# Altium PCB PCB1.PcbDoc (part 6 of 8)
Units mil, origin at the board's own origin, x right, y up, seen from the top; angles counter-clockwise.
Board outline 3820 x 2600 mil, 2 copper layers (Top Layer, Bottom Layer); 88 components, 130 nets, 566 pads, 113 vias.
Unrouted connection lines stored in the file: 16.
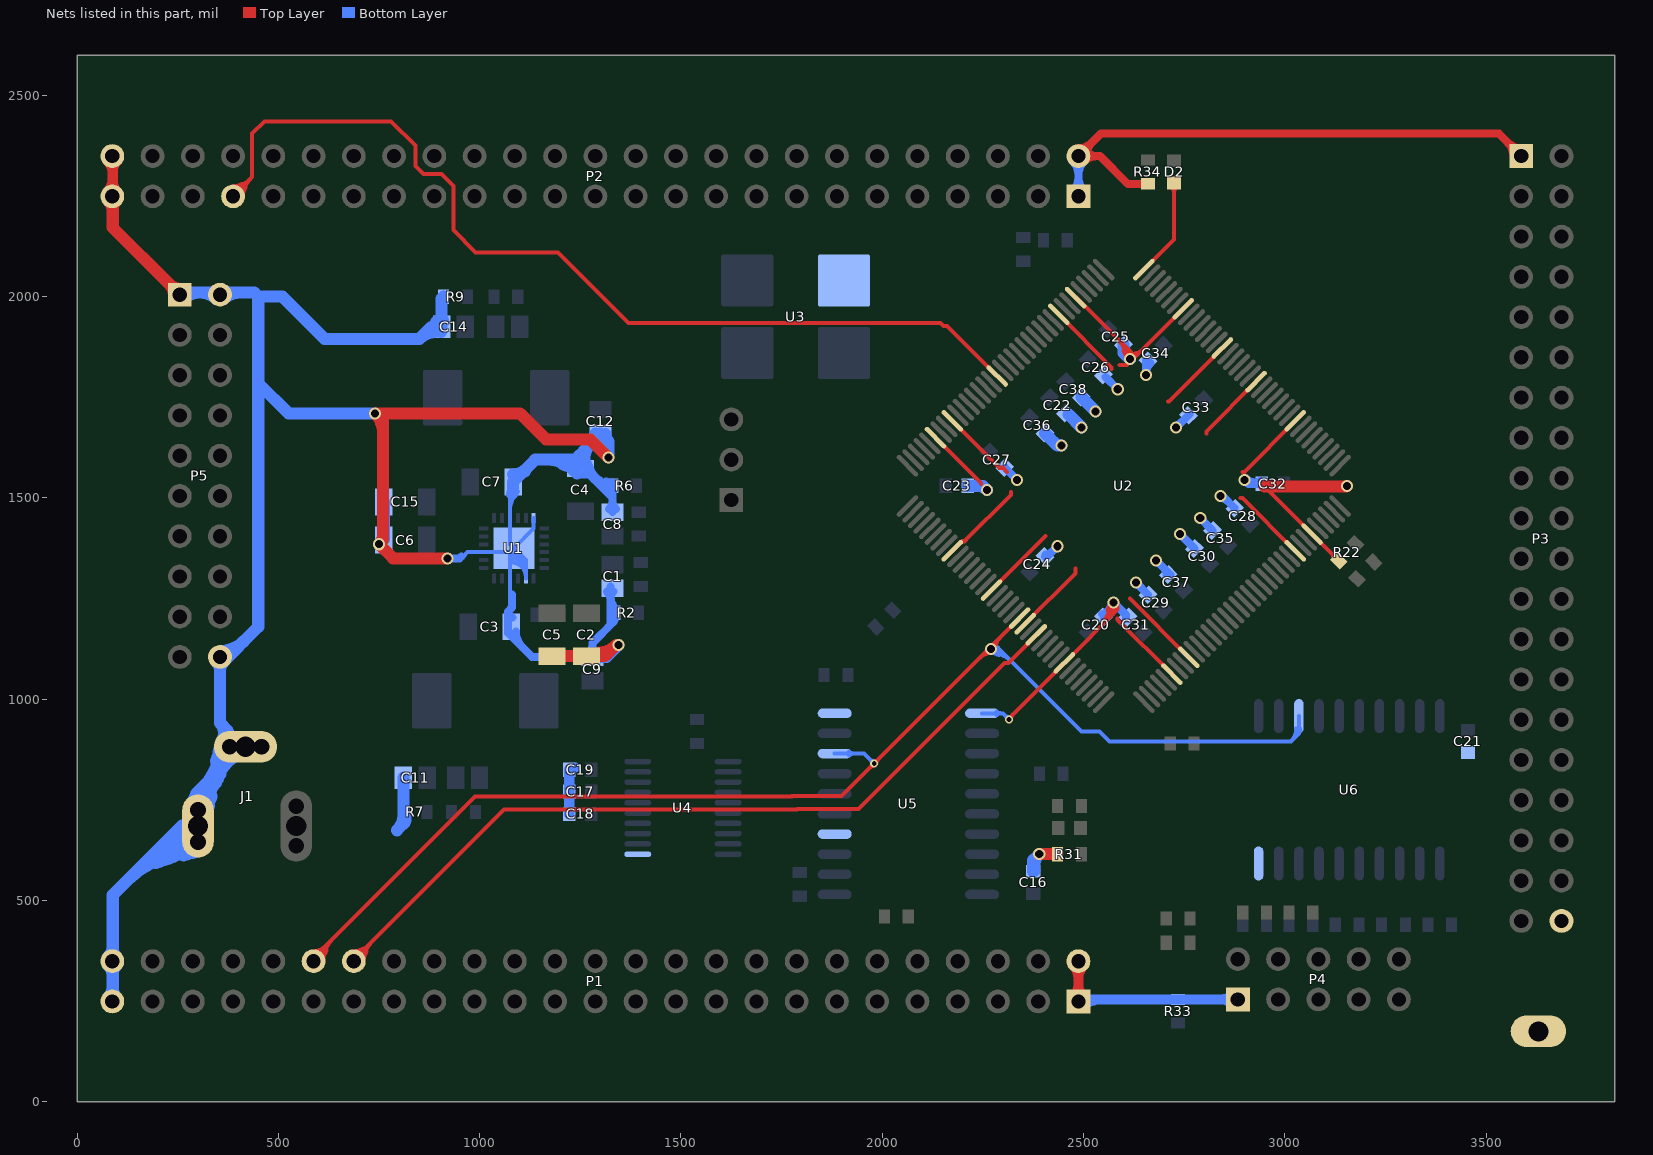
[diagram p6: the nets of this part, all layers, seen from the top]

## Via types
v1: diameter 30, hole 20, Top Layer to Bottom Layer, 74 vias
v2: diameter 20, hole 12, Top Layer to Bottom Layer, 36 vias
v3: diameter 17.72, hole 11.81, Top Layer to Bottom Layer, 3 vias

## Nets (pads, with @x,y where several pads share a name; then routed paths per layer and width w, separated by ;. In a path a pad name is that pad's centre, name@x,y a point inside that pad or via, vN(x,y) a via of type N, cw(c..) or ccw(c..) an arc to the next point about the centre after c; other vN are vias at no path point) (continued)
GND: C1.1 C2.2 C3.2 C4.2 C5.2 C6.2 C7.2 C8.1 C9.1 C11.1 C12.1 C14.1 C15.2 C16.2 C17.1 C18.2 C19.1 C20.1 C21.2 C22.1 C23.1 C24.1 C25.1 C26.1 C27.1 C28.1 C29.1 C30.1 C31.1 C32.1 C33.1 C34.1 C35.1 C36.1 C37.1 C38.1 J1.2 J1.2A J1.2B J1.3 J1.3A J1.3B P1.1 P1.2 P1.49 P1.50 P2.1 P2.2 P2.49 P2.50 P3.1 P3.40 P4.1 P5.1 P5.2 P5.20 pad.0 R2.1 R6.1 R7.1 R9.1 R22.1 R31.1 R33.1 R34.2 U1.2 U1.4 U1.9 U1.15 U1.18 U1.25 U2.9 U2.16 U2.22 U2.29 U2.42 U2.45 U2.64 U2.67 U2.81 U2.88 U2.94 U2.101 U2.114 U2.117 U2.136 U2.139 U3.2 U4.11 U5.4 U5.10 U5.11 U6.10 | length 38025
  Top Layer w10: U2.67@2132.31,1649.71 2245,1537.02 2245,1535 ; U2.81@2174.07,1368.53 2197.93,1392.4 2204.56,1392.4 2320,1507.84 2320,1515 ; U2.64@2174.07,1691.47 2290.53,1575 2300,1575 2310,1565 ; U2.88@2271.5,1271.1 2271.5,1271.5 2405,1405 ; v2@2313.65,951.35 U2.101@2452.45,1090.15 2585,1222.69 v1@2585,1230 ; U2.94@2355.02,1187.58 2480,1312.56 2480,1325 ; U2.45@2438.53,1955.93 2570,1824.47 2570,1820 ; U2.42@2480.29,1997.69 2482.31,1997.69 2615,1865 ; 2559.45,1210.39 ccw(c2540.97,1228.54) v1@2565.52,1236.81 ; v1@2565.39,1237.22 cw(c2556.13,1234.55) 2563.01,1227.79 cw(c2569.89,1221.04) v1@2572.4,1230.34 ; 2570.87,1222.01 ccw(c2558.28,1234.37) v1(2575,1240) ; 2585,1200 2585,1197.02 U2.114@2719.71,1062.31 ; 2590,1830 2607.69,1830 ; v1@2605.37,1847.71 ccw(c2596.16,1850.3) 2602.93,1857.07 ccw(c2609.7,1863.84) v1@2612.29,1854.63 ; 2615,1250 2760.93,1104.07 U2.117@2761.47,1104.07 ; v1@2618.85,1841.15 U2.29@2747.55,1969.85 ; 2710,1740 2712.56,1740 U2.22@2844.98,1872.42 ; 2805,1660 2805,1665.4 U2.16@2928.5,1788.9 ; 2890,1500 2894.47,1500 U2.136@3025.93,1368.53 ; 2895,1565 2899.47,1565 U2.9@3025.93,1691.47 ; 2950,1530 2950,1527.98 U2.139@3067.69,1410.29 3133.86,1344.12 R22.1@3144.12,1344.12 ; U2.81@2194.95,1390.32 ccw(c2194.95,1408.5) 2207.8,1395.64 ; U2.81@2194.95,1390.32 ccw(c2194.95,1408.5) 2207.8,1395.64 ; U2.81@2194.95,1390.32 ccw(c2194.95,1408.5) 2207.8,1395.64 ; U2.81@2195.59,1388.77 cw(c2204.34,1380.01) 2204.34,1392.4 ; U2.81@2195.59,1388.77 cw(c2204.34,1380.01) 2204.34,1392.4 ; U2.81@2195.59,1388.77 cw(c2204.34,1380.01) 2204.34,1392.4 ; 2538.62,1176.31 ccw(c2474.93,1240) v1@2565,1240 ; 2538.62,1176.31 ccw(c2474.93,1240) v1@2565,1240 ; 2538.62,1176.31 ccw(c2474.93,1240) v1@2565,1240 ; 2553.74,1196.41 cw(c2609.12,1182.11) v1@2580.08,1231.39 ; 2553.74,1196.41 cw(c2609.12,1182.11) v1@2580.08,1231.39 ; 2553.74,1196.41 cw(c2609.12,1182.11) v1@2580.08,1231.39 ; 2555.69,1193.38 ccw(c2509.07,1240) v1(2575,1240) ; 2555.69,1193.38 ccw(c2509.07,1240) v1(2575,1240) ; 2555.69,1193.38 ccw(c2509.07,1240) v1(2575,1240) ; 2559.78,1219.79 cw(c2591.79,1211.52) v1(2575,1240) ; 2559.78,1219.79 cw(c2591.79,1211.52) v1(2575,1240) ; 2559.78,1219.79 cw(c2591.79,1211.52) v1(2575,1240) ; v1@2566.34,1235 cw(c2545.43,1222.93) 2568.75,1216.68 ; v1@2566.34,1235 cw(c2545.43,1222.93) 2568.75,1216.68 ; v1@2566.34,1235 cw(c2545.43,1222.93) 2568.75,1216.68 ; 2568.75,1216.68 cw(c2592.07,1210.43) v1@2580,1231.34 ; 2568.75,1216.68 cw(c2592.07,1210.43) v1@2580,1231.34 ; 2568.75,1216.68 cw(c2592.07,1210.43) v1@2580,1231.34 ; 2572.76,1210.45 ccw(c2543.21,1240) v1@2585,1240 ; 2572.76,1210.45 ccw(c2543.21,1240) v1@2585,1240 ; 2572.76,1210.45 ccw(c2543.21,1240) v1@2585,1240 ; 2583.79,1896.21 cw(c2532.57,1845) v1@2605,1845 ; 2583.79,1896.21 cw(c2532.57,1845) v1@2605,1845 ; 2583.79,1896.21 cw(c2532.57,1845) v1@2605,1845 ; 2599.63,1865.02 ccw(c2631.49,1873.56) v1(2615,1845) ; 2599.63,1865.02 ccw(c2631.49,1873.56) v1(2615,1845) ; 2599.63,1865.02 ccw(c2631.49,1873.56) v1(2615,1845) ; 2600.86,1879.14 cw(c2566.72,1845) v1(2615,1845) ; 2600.86,1879.14 cw(c2566.72,1845) v1(2615,1845) ; 2600.86,1879.14 cw(c2566.72,1845) v1(2615,1845) ; v1@2606.34,1850 ccw(c2585.43,1862.07) 2608.75,1868.32 ; v1@2606.34,1850 ccw(c2585.43,1862.07) 2608.75,1868.32 ; v1@2606.34,1850 ccw(c2585.43,1862.07) 2608.75,1868.32 ; 2608.75,1868.32 ccw(c2632.07,1874.57) v1@2620,1853.66 ; 2608.75,1868.32 ccw(c2632.07,1874.57) v1@2620,1853.66 ; 2608.75,1868.32 ccw(c2632.07,1874.57) v1@2620,1853.66 ; v1(2615,1845) cw(c2638.96,1834.22) 2632.16,1859.6 ; v1(2615,1845) cw(c2638.96,1834.22) 2632.16,1859.6 ; v1(2615,1845) cw(c2638.96,1834.22) 2632.16,1859.6 ; v1@2615,1855 ccw(c2615,1897.71) 2645.2,1867.51 ; v1@2615,1855 ccw(c2615,1897.71) 2645.2,1867.51 ; v1@2615,1855 ccw(c2615,1897.71) 2645.2,1867.51 ; 2617.93,1862.07 cw(c2600.86,1845) v1@2625,1845 ; 2617.93,1862.07 cw(c2600.86,1845) v1@2625,1845 ; 2617.93,1862.07 cw(c2600.86,1845) v1@2625,1845 ; 3115.91,1362.07 ccw(c3131.34,1377.5) R22.1@3131.34,1355.68 ; 3115.91,1362.07 ccw(c3131.34,1377.5) R22.1@3131.34,1355.68 ; 3115.91,1362.07 ccw(c3131.34,1377.5) R22.1@3131.34,1355.68 ; 3116.53,1361.45 cw(c3101.98,1346.9) R22.1@3122.56,1346.9 ; 3116.53,1361.45 cw(c3101.98,1346.9) R22.1@3122.56,1346.9 ; 3116.53,1361.45 cw(c3101.98,1346.9) R22.1@3122.56,1346.9 ; 3120.14,1355.93 ccw(c3133.8,1359.59) R22.1@3131.1,1345.71 ; 3120.14,1355.93 ccw(c3133.8,1359.59) R22.1@3131.1,1345.71 ; 3120.14,1355.93 ccw(c3133.8,1359.59) R22.1@3131.1,1345.71 ; 3122.05,1358.17 cw(c3118.28,1344.09) R22.1@3132.53,1347.16 ; 3122.05,1358.17 cw(c3118.28,1344.09) R22.1@3132.53,1347.16 ; 3122.05,1358.17 cw(c3118.28,1344.09) R22.1@3132.53,1347.16 ; v2@2320,950 cw(c2338.57,950) 2325.44,963.13 ccw(c2338.57,950) v2@2320,950
  Top Layer w20: R34.2@2660,2280.47 2659.53,2280 2610,2280 2540.79,2349.21 P2.2@2487.4,2349.21 2543.19,2405 3531.61,2405 P3.1@3587.4,2349.21 ; P2.2@2486.94,2349.31 cw(c2520,2342.54) 2511.26,2375.13 ; P2.2@2486.94,2349.31 cw(c2520,2342.54) 2511.26,2375.13 ; P2.2@2486.94,2349.31 cw(c2520,2342.54) 2511.26,2375.13 ; P2.2@2487.4,2368.74 ccw(c2487.4,2415.88) 2520.74,2382.55 ; P2.2@2487.4,2368.74 ccw(c2487.4,2415.88) 2520.74,2382.55 ; P2.2@2487.4,2368.74 ccw(c2487.4,2415.88) 2520.74,2382.55 ; P2.2@2487.5,2348.75 ccw(c2480.73,2381.81) 2513.32,2373.08 ; P2.2@2487.5,2348.75 ccw(c2480.73,2381.81) 2513.32,2373.08 ; P2.2@2487.5,2348.75 ccw(c2480.73,2381.81) 2513.32,2373.08 ; P2.2@2501.21,2335.4 cw(c2534.54,2302.07) 2534.54,2349.21 ; P2.2@2501.21,2335.4 cw(c2534.54,2302.07) 2534.54,2349.21 ; P2.2@2501.21,2335.4 cw(c2534.54,2302.07) 2534.54,2349.21 ; P2.2@2501.21,2363.02 ccw(c2534.54,2396.36) 2534.54,2349.21 ; P2.2@2501.21,2363.02 ccw(c2534.54,2396.36) 2534.54,2349.21 ; P2.2@2501.21,2363.02 ccw(c2534.54,2396.36) 2534.54,2349.21 ; P2.2@2506.93,2349.21 cw(c2554.07,2349.21) 2520.74,2382.55 ; P2.2@2506.93,2349.21 cw(c2554.07,2349.21) 2520.74,2382.55 ; P2.2@2506.93,2349.21 cw(c2554.07,2349.21) 2520.74,2382.55 ; 3554.07,2382.55 cw(c3520.73,2349.21) P3.1@3567.87,2349.21 ; 3554.07,2382.55 ccw(c3587.4,2415.88) P3.1@3587.4,2368.74 ; 3554.07,2382.55 cw(c3520.73,2349.21) P3.1@3567.87,2349.21 ; 3554.07,2382.55 ccw(c3587.4,2415.88) P3.1@3587.4,2368.74 ; 3554.07,2382.55 ccw(c3587.4,2415.88) P3.1@3587.4,2368.74 ; 3554.07,2382.55 cw(c3520.73,2349.21) P3.1@3567.87,2349.21
  Top Layer w25: P2.49@88.46,2249.21 P2.50@88.46,2349.21 ; P1.1@2487.4,249.21 P1.2@2487.4,349.21 ; P2.49@75.36,2261.25 ccw(c43.73,2292.89) 88.46,2292.89 ; P2.49@75.36,2261.25 ccw(c43.73,2292.89) 88.46,2292.89 ; P2.49@75.36,2261.25 ccw(c43.73,2292.89) 88.46,2292.89 ; P2.50@75.36,2337.17 cw(c43.73,2305.54) 88.46,2305.54 ; P2.50@75.36,2337.17 cw(c43.73,2305.54) 88.46,2305.54 ; P2.50@75.36,2337.17 cw(c43.73,2305.54) 88.46,2305.54 ; 88.46,2287.75 ccw(c125.94,2287.75) P2.49@99.44,2261.25 ; 88.46,2287.75 ccw(c125.94,2287.75) P2.49@99.44,2261.25 ; 88.46,2287.75 ccw(c125.94,2287.75) P2.49@99.44,2261.25 ; 88.46,2310.67 cw(c125.94,2310.67) P2.50@99.44,2337.17 ; 88.46,2310.67 cw(c125.94,2310.67) P2.50@99.44,2337.17 ; 88.46,2310.67 cw(c125.94,2310.67) P2.50@99.44,2337.17 ; P1.1@2475.36,261.25 ccw(c2446.29,290.32) 2487.4,290.32 ; P1.1@2475.36,261.25 ccw(c2446.29,290.32) 2487.4,290.32 ; P1.1@2475.36,261.25 ccw(c2446.29,290.32) 2487.4,290.32 ; P1.2@2475.36,337.17 cw(c2446.29,308.1) 2487.4,308.1 ; P1.2@2475.36,337.17 cw(c2446.29,308.1) 2487.4,308.1 ; P1.2@2475.36,337.17 cw(c2446.29,308.1) 2487.4,308.1 ; 2487.4,290.32 ccw(c2528.51,290.32) P1.1@2499.44,261.25 ; 2487.4,290.32 ccw(c2528.51,290.32) P1.1@2499.44,261.25 ; 2487.4,290.32 ccw(c2528.51,290.32) P1.1@2499.44,261.25 ; 2487.4,308.1 cw(c2528.51,308.1) P1.2@2499.44,337.17 ; 2487.4,308.1 cw(c2528.51,308.1) P1.2@2499.44,337.17 ; 2487.4,308.1 cw(c2528.51,308.1) P1.2@2499.44,337.17
  Top Layer w30: P2.49@88.46,2249.21 88.46,2171.54 P5.1@232.5,2027.5 ; v1(920,1350) 785,1350 v1(750,1385) ; C5.2@1180,1106.85 C2.2@1265,1106.85 1311.85,1106.85 v1@1340,1135 ; v1(1320,1600) 1275,1645 1165,1645 1100,1710 v1(740,1710) ; v1(1345,1135) v1@1340,1135 ; v1(2390,615) R31.1@2435.47,615 ; 2950,1527.98 3152.98,1527.98 v1(3155,1530) ; P2.49@77.13,2238.94 cw(c49.76,2211.57) 88.46,2211.57 ; P2.49@77.13,2238.94 cw(c49.76,2211.57) 88.46,2211.57 ; P2.49@77.13,2238.94 cw(c49.76,2211.57) 88.46,2211.57 ; 88.46,2216.71 cw(c119.91,2216.71) P2.49@97.67,2238.94 ; 88.46,2216.71 cw(c119.91,2216.71) P2.49@97.67,2238.94 ; 88.46,2216.71 cw(c119.91,2216.71) P2.49@97.67,2238.94 ; P5.1@230.2,2029.8 cw(c205.4,2005) P5.1@240.47,2005 ; P5.1@230.2,2029.8 ccw(c255,2054.6) P5.1@255,2019.53 ; P5.1@230.2,2029.8 cw(c205.4,2005) P5.1@240.47,2005 ; P5.1@230.2,2029.8 ccw(c255,2054.6) P5.1@255,2019.53 ; P5.1@230.2,2029.8 ccw(c255,2054.6) P5.1@255,2019.53 ; P5.1@230.2,2029.8 cw(c205.4,2005) P5.1@240.47,2005 ; v1(740,1710) cw(c691.72,1661.72) 760,1661.72 ; v1(740,1710) cw(c730,1681.72) 760,1681.72 ; v1(740,1710) cw(c691.72,1661.72) 760,1661.72 ; v1(740,1710) cw(c730,1681.72) 760,1681.72 ; v1(740,1710) cw(c730,1681.72) 760,1681.72 ; v1(740,1710) cw(c691.72,1661.72) 760,1661.72 ; v1(740,1710) 760,1690 760,1395 v1(750,1385) ; v1(750,1385) ccw(c725.86,1409.14) 760,1409.14 ; v1(750,1385) ccw(c725.86,1409.14) 760,1409.14 ; v1(750,1385) ccw(c725.86,1409.14) 760,1409.14 ; C2.2@1277.61,1113.46 ccw(c1286.67,1188.32) v1@1340,1135 ; C2.2@1277.61,1113.46 ccw(c1286.67,1188.32) v1@1340,1135 ; C2.2@1277.61,1113.46 ccw(c1286.67,1188.32) v1@1340,1135 ; C2.2@1282.13,1102.86 cw(c1312.52,1080.04) 1307.17,1117.66 ; C2.2@1282.13,1102.86 cw(c1312.52,1080.04) 1307.17,1117.66 ; C2.2@1282.13,1102.86 cw(c1312.52,1080.04) 1307.17,1117.66
  Bottom Layer w10: 955,1355 959.7,1355 969.86,1365.16 U1.9@1010,1365.16 U1.25@1075.16,1365.16 ; 1080,1260 1075.16,1264.84 U1.4@1075.16,1300 U1.25@1075.16,1365.16 ; C7.2@1080,1510 1075.16,1505.16 U1.15@1075.16,1450 1075.16,1384.84 U1.25@1085,1375 ; U1.2@1114.53,1300 1114.53,1345.47 U1.25@1085,1375 ; U1.18@1134.21,1450 1134.21,1424.21 U1.25@1085,1375 ; U5.11@2248.07,965 2300,965 v2(2315,950) ; C7.2@1071.37,1516.41 cw(c1062.24,1507.28) C7.2@1075.16,1507.28 ; C7.2@1071.37,1516.41 cw(c1062.24,1507.28) C7.2@1075.16,1507.28 ; C7.2@1071.37,1516.41 cw(c1062.24,1507.28) C7.2@1075.16,1507.28 ; C7.2@1071.37,1516.41 cw(c1062.24,1507.28) C7.2@1075.16,1507.28 ; C7.2@1071.37,1516.41 cw(c1062.24,1507.28) C7.2@1075.16,1507.28 ; C7.2@1071.37,1516.41 cw(c1062.24,1507.28) C7.2@1075.16,1507.28 ; U1.25@1075.16,1365.16 U1.25@1085,1375 ; 1075.16,1468.69 cw(c1142.65,1468.69) C7.2@1094.93,1516.41 ; 1075.16,1468.69 cw(c1142.65,1468.69) C7.2@1094.93,1516.41 ; 1075.16,1468.69 cw(c1142.65,1468.69) C7.2@1094.93,1516.41 ; 1075.16,1492.83 cw(c1118.51,1492.83) C7.2@1087.85,1523.48 ; 1075.16,1492.83 cw(c1118.51,1492.83) C7.2@1087.85,1523.48 ; 1075.16,1492.83 cw(c1118.51,1492.83) C7.2@1087.85,1523.48 ; U1.25@1082.66,1339.08 cw(c1080.45,1305.07) U1.2@1114.53,1305.07 ; U1.25@1082.66,1339.08 cw(c1080.45,1305.07) U1.2@1114.53,1305.07 ; U1.25@1082.66,1339.08 cw(c1080.45,1305.07) U1.2@1114.53,1305.07 ; U1.25@1083.31,1349.05 cw(c1081.15,1315.74) 1114.53,1315.74 ; U1.25@1083.31,1349.05 cw(c1081.15,1315.74) 1114.53,1315.74 ; U1.25@1083.31,1349.05 cw(c1081.15,1315.74) 1114.53,1315.74 ; U1.25@1083.96,1359.03 cw(c1081.84,1326.41) U1.25@1114.53,1326.41 ; U1.25@1083.96,1359.03 cw(c1081.84,1326.41) U1.25@1114.53,1326.41 ; U1.25@1083.96,1359.03 cw(c1081.84,1326.41) U1.25@1114.53,1326.41 ; 2295.03,965 cw(c2295.03,981.44) 2283.4,969.82 ccw(c2295.03,981.44) 2295.03,965 ; 2295.03,965 ccw(c2295.03,948.56) 2283.4,960.18 cw(c2295.03,948.56) 2295.03,965 ; 2306.46,958.54 cw(c2297.93,950) 2310,950 ccw(c2297.93,950) 2306.46,958.54 ; 2306.46,958.54 ccw(c2315,967.07) 2315,955 cw(c2315,967.07) 2306.46,958.54
  Bottom Layer w20: v1(920,1350) 950,1350 955,1355 ; 1080,1260 1080,1227.45 1070,1217.45 ; C4.2@1250,1558.15 C4.2@1272.32,1558.15 ; C1.1@1325,1280.47 1325,1195.47 1330.47,1190 ; C8.1@1330,1464.53 R6.1@1330,1529.53 ; 1330,1499.53 1330.47,1500 C4.2@1272.32,1558.15 ; C27.1@2304.49,1575.51 v1(2335,1545) ; C24.1@2404.49,1354.49 2409.49,1354.49 v1(2435,1380) ; P2.2@2487.4,2349.21 2487.4,2253.15 P2.1@2499.25,2265 ; C20.1@2549.49,1204.49 2575,1230 v1(2575,1240) 2605.51,1209.49 C31.1@2605.51,1199.49 ; C26.1@2554.49,1800.51 v1(2585,1770) ; v1(2630,1290) C29.1@2660.51,1259.49 ; v1(2655,1805) 2655.51,1805.51 C34.1@2655.51,1840.51 ; v1(2680,1345) C37.1@2715.51,1309.49 ; v1(2730,1675) C33.1@2763.01,1708.01 ; v1(2740,1410) C30.1@2775.51,1374.49 ; v1(2790,1450) C35.1@2820.51,1419.49 ; v1(2840,1505) 2845,1505 C28.1@2875.51,1474.49 ; v1(2900,1545) 2910,1535 C32.1@2942.44,1535 ; 1070,1217.45 ccw(c1084.85,1217.45) C3.2@1081.09,1203.09 ; 1070,1217.45 ccw(c1084.85,1217.45) C3.2@1081.09,1203.09 ; 1070,1217.45 ccw(c1084.85,1217.45) C3.2@1081.09,1203.09 ; 1070,1217.45 1070,1165 1130.47,1104.53 C9.1@1280,1104.53 1280,1139.53 1330.47,1190 ; C3.2@1089.8,1168.19 ccw(c1145.31,1168.19) 1106.06,1128.94 ; C3.2@1089.8,1168.19 ccw(c1145.31,1168.19) 1106.06,1128.94 ; C3.2@1089.8,1168.19 ccw(c1145.31,1168.19) 1106.06,1128.94 ; 1245.96,1104.53 cw(c1245.96,1076.39) C9.1@1265.85,1096.29 ; 1245.96,1104.53 ccw(c1245.96,1132.66) C9.1@1265.85,1112.77 ; 1245.96,1104.53 cw(c1245.96,1076.39) C9.1@1265.85,1096.29 ; 1245.96,1104.53 ccw(c1245.96,1132.66) C9.1@1265.85,1112.77 ; 1245.96,1104.53 ccw(c1245.96,1132.66) C9.1@1265.85,1112.77 ; 1245.96,1104.53 cw(c1245.96,1076.39) C9.1@1265.85,1096.29 ; C4.2@1262.32,1561.51 cw(c1263.67,1530.64) 1290.43,1546.09 ; C4.2@1262.32,1561.51 cw(c1263.67,1530.64) 1290.43,1546.09 ; C4.2@1262.32,1561.51 cw(c1263.67,1530.64) 1290.43,1546.09 ; C9.1@1271.76,1112.77 ccw(c1251.87,1132.66) 1280,1132.66 ; C9.1@1271.76,1112.77 ccw(c1251.87,1132.66) 1280,1132.66 ; C9.1@1271.76,1112.77 ccw(c1251.87,1132.66) 1280,1132.66 ; C4.2@1272.32,1558.15 ccw(c1322.64,1608.46) R6.1@1330.08,1537.7 ; C4.2@1272.32,1558.15 ccw(c1322.64,1608.46) R6.1@1330.08,1537.7 ; C4.2@1272.32,1558.15 ccw(c1322.64,1608.46) R6.1@1330.08,1537.7 ; C4.2@1273.07,1576.17 ccw(c1325.75,1590.28) 1298.48,1543.05 ; C4.2@1273.07,1576.17 ccw(c1325.75,1590.28) 1298.48,1543.05 ; C4.2@1273.07,1576.17 ccw(c1325.75,1590.28) 1298.48,1543.05 ; C4.2@1273.07,1576.17 ccw(c1325.75,1590.28) 1298.48,1543.05 ; C4.2@1273.46,1573.15 ccw(c1312.43,1573.15) 1284.88,1545.59 ; C4.2@1273.46,1573.15 ccw(c1312.43,1573.15) 1284.88,1545.59 ; C4.2@1273.46,1573.15 ccw(c1312.43,1573.15) 1284.88,1545.59 ; 1280,1132.66 ccw(c1308.13,1132.66) C9.1@1288.24,1112.77 ; 1280,1132.66 ccw(c1308.13,1132.66) C9.1@1288.24,1112.77 ; 1280,1132.66 ccw(c1308.13,1132.66) C9.1@1288.24,1112.77 ; 1301.97,1528.5 ccw(c1328.28,1554.8) R6.1@1332.17,1517.81 ; 1301.97,1528.5 ccw(c1328.28,1554.8) R6.1@1332.17,1517.81 ; 1301.97,1528.5 ccw(c1328.28,1554.8) R6.1@1332.17,1517.81 ; 1313.33,1540.35 cw(c1309.95,1519.03) R6.1@1327.41,1531.72 ; 1313.33,1540.35 cw(c1309.95,1519.03) R6.1@1327.41,1531.72 ; 1313.33,1540.35 cw(c1309.95,1519.03) R6.1@1327.41,1531.72 ; C1.1@1315.85,1267.23 cw(c1293.77,1245.15) 1325,1245.15 ; C1.1@1315.85,1267.23 cw(c1293.77,1245.15) 1325,1245.15 ; C1.1@1315.85,1267.23 cw(c1293.77,1245.15) 1325,1245.15 ; 1317.66,1177.19 ccw(c1283.79,1211.06) R2.1@1331.69,1211.06 ; 1317.66,1177.19 ccw(c1283.79,1211.06) R2.1@1331.69,1211.06 ; 1317.66,1177.19 ccw(c1283.79,1211.06) R2.1@1331.69,1211.06 ; C8.1@1321.76,1472.77 ccw(c1301.87,1492.66) 1330,1492.66 ; C8.1@1321.76,1472.77 ccw(c1301.87,1492.66) 1330,1492.66 ; C8.1@1321.76,1472.77 ccw(c1301.87,1492.66) 1330,1492.66 ; 1325,1192.28 cw(c1340.72,1192.28) R2.1@1336.49,1207.42 ; 1325,1192.28 cw(c1340.72,1192.28) R2.1@1336.49,1207.42 ; 1325,1192.28 cw(c1340.72,1192.28) R2.1@1336.49,1207.42 ; R2.1@1325,1218.64 cw(c1333.35,1218.64) R2.1@1331.11,1226.68 ; R2.1@1325,1218.64 cw(c1333.35,1218.64) R2.1@1331.11,1226.68 ; R2.1@1325,1218.64 cw(c1333.35,1218.64) R2.1@1331.11,1226.68 ; 1325,1249.52 cw(c1350.04,1249.52) C1.1@1332.33,1267.23 ; 1325,1249.52 cw(c1350.04,1249.52) C1.1@1332.33,1267.23 ; 1325,1249.52 cw(c1350.04,1249.52) C1.1@1332.33,1267.23 ; 1325,1253.34 ccw(c1369.88,1253.34) R2.1@1338.14,1221.61 ; 1325,1253.34 ccw(c1369.88,1253.34) R2.1@1338.14,1221.61 ; 1325,1253.34 ccw(c1369.88,1253.34) R2.1@1338.14,1221.61 ; 1327.3,1194.68 cw(c1348.16,1189.09) R2.1@1337.36,1207.79 ; 1327.3,1194.68 cw(c1348.16,1189.09) R2.1@1337.36,1207.79 ; 1327.3,1194.68 cw(c1348.16,1189.09) R2.1@1337.36,1207.79 ; 1329.66,1236.3 cw(c1310.97,1225.5) R2.1@1331.82,1219.92 ; 1329.66,1236.3 cw(c1310.97,1225.5) R2.1@1331.82,1219.92 ; 1329.66,1236.3 cw(c1310.97,1225.5) R2.1@1331.82,1219.92 ; 1330,1492.66 ccw(c1358.13,1492.66) C8.1@1338.24,1472.77 ; 1330,1492.66 ccw(c1358.13,1492.66) C8.1@1338.24,1472.77 ; 1330,1492.66 ccw(c1358.13,1492.66) C8.1@1338.24,1472.77 ; 1330.47,1190 ccw(c1319.86,1200.61) R2.1@1332.33,1208.96 ; 1330.47,1190 ccw(c1319.86,1200.61) R2.1@1332.33,1208.96 ; 1330.47,1190 ccw(c1319.86,1200.61) R2.1@1332.33,1208.96 ; C24.1@2405.88,1358.84 ccw(c2405.88,1378.07) 2419.47,1364.47 ; C24.1@2405.88,1358.84 ccw(c2405.88,1378.07) 2419.47,1364.47 ; C24.1@2405.88,1358.84 ccw(c2405.88,1378.07) 2419.47,1364.47 ; P2.1@2473.59,2263.02 ccw(c2440.26,2296.36) 2487.4,2296.36 ; P2.1@2473.59,2263.02 ccw(c2440.26,2296.36) 2487.4,2296.36 ; P2.1@2473.59,2263.02 ccw(c2440.26,2296.36) 2487.4,2296.36 ; P2.2@2473.59,2335.4 cw(c2440.26,2302.07) 2487.4,2302.07 ; P2.2@2473.59,2335.4 cw(c2440.26,2302.07) 2487.4,2302.07 ; P2.2@2473.59,2335.4 cw(c2440.26,2302.07) 2487.4,2302.07 ; 2487.4,2296.36 ccw(c2534.54,2296.36) P2.1@2501.21,2263.02 ; 2487.4,2296.36 ccw(c2534.54,2296.36) P2.1@2501.21,2263.02 ; 2487.4,2296.36 ccw(c2534.54,2296.36) P2.1@2501.21,2263.02 ; 2487.4,2302.07 cw(c2534.54,2302.07) P2.2@2501.21,2335.4 ; 2487.4,2302.07 cw(c2534.54,2302.07) P2.2@2501.21,2335.4 ; 2487.4,2302.07 cw(c2534.54,2302.07) P2.2@2501.21,2335.4 ; C20.1@2546.61,1211.43 ccw(c2538.13,1243.06) 2566.49,1226.69 ; C20.1@2546.61,1211.43 ccw(c2538.13,1243.06) 2566.49,1226.69 ; C20.1@2546.61,1211.43 ccw(c2538.13,1243.06) 2566.49,1226.69 ; C20.1@2559.39,1214.39 ccw(c2533.79,1240) v1@2570,1240 ; C20.1@2559.39,1214.39 ccw(c2533.79,1240) v1@2570,1240 ; C20.1@2559.39,1214.39 ccw(c2533.79,1240) v1@2570,1240 ; 2563.07,1223.27 ccw(c2546.33,1240) v1@2570,1240 ; 2563.07,1223.27 ccw(c2546.33,1240) v1@2570,1240 ; 2563.07,1223.27 ccw(c2546.33,1240) v1@2570,1240 ; 2563.07,1223.27 ccw(c2546.33,1240) v1@2570,1240 ; 2564.19,1218.33 cw(c2591.78,1210.94) v1@2577.5,1235.67 ; 2564.19,1218.33 cw(c2591.78,1210.94) v1@2577.5,1235.67 ; 2564.19,1218.33 cw(c2591.78,1210.94) v1@2577.5,1235.67 ; v1@2655.51,1809.81 cw(c2691.21,1809.81) C34.1@2665.97,1835.06 ; v1@2655.51,1809.81 cw(c2691.21,1809.81) C34.1@2665.97,1835.06 ; v1@2655.51,1809.81 cw(c2691.21,1809.81) C34.1@2665.97,1835.06 ; 2700.53,1324.47 cw(c2686.93,1310.88) C37.1@2706.16,1310.88 ; 2700.53,1324.47 cw(c2686.93,1310.88) C37.1@2706.16,1310.88 ; 2700.53,1324.47 cw(c2686.93,1310.88) C37.1@2706.16,1310.88 ; v1@2840,1500 cw(c2840,1475.86) 2857.07,1492.93 ; v1@2840,1500 cw(c2840,1475.86) 2857.07,1492.93 ; v1@2840,1500 cw(c2840,1475.86) 2857.07,1492.93 ; v1@2901.49,1540.23 cw(c2909.09,1515.89) 2921.84,1537.97 ; v1@2901.49,1540.23 cw(c2909.09,1515.89) 2921.84,1537.97 ; v1@2901.49,1540.23 cw(c2909.09,1515.89) 2921.84,1537.97 ; v1@2903.54,1548.54 ccw(c2936.21,1581.21) C32.1@2936.21,1535 ; v1@2903.54,1548.54 ccw(c2936.21,1581.21) C32.1@2936.21,1535 ; v1@2903.54,1548.54 ccw(c2936.21,1581.21) C32.1@2936.21,1535 ; 2919.93,1539.36 ccw(c2926.63,1564.35) C32.1@2939.57,1541.95 ; 2919.93,1539.36 ccw(c2926.63,1564.35) C32.1@2939.57,1541.95 ; 2919.93,1539.36 ccw(c2926.63,1564.35) C32.1@2939.57,1541.95
  Bottom Layer w25: C18.2@1222.44,715 C17.1@1222.44,770 C19.1@1222.44,825 ; P1.1@2487.4,254.21 P4.1@2883.46,254.21 ; P1.1@2499.44,237.17 cw(c2540.58,196.03) 2540.58,254.21 ; P1.1@2499.44,237.17 cw(c2540.58,196.03) 2540.58,254.21 ; P1.1@2499.44,237.17 cw(c2540.58,196.03) 2540.58,254.21 ; 2842.36,254.21 cw(c2842.36,213.1) P4.1@2871.42,242.17 ; 2842.36,254.21 ccw(c2842.36,295.32) P4.1@2871.42,266.25 ; 2842.36,254.21 cw(c2842.36,213.1) P4.1@2871.42,242.17 ; 2842.36,254.21 ccw(c2842.36,295.32) P4.1@2871.42,266.25 ; 2842.36,254.21 ccw(c2842.36,295.32) P4.1@2871.42,266.25 ; 2842.36,254.21 cw(c2842.36,213.1) P4.1@2871.42,242.17
  Bottom Layer w30: P1.49@88.46,249.21 88.46,513.46 260.63,685.63 ; P5.1@255,2010 440,2010 450,2000 ; J1.2@279.61,623.13 ccw(c281.83,666.09) J1.2@310.64,634.14 ; J1.2@292.76,622.45 ccw(c273.14,561.94) 228.21,606.96 ; J1.2@295.28,685.63 260.63,685.63 ; 295.28,764.37 374.02,843.11 374.02,921.85 ; J1.2@304.79,676.11 cw(c353.05,724.37) J1.2@284.8,724.37 ; J1.2@314.1,728.83 cw(c350.22,740.49) 323.39,767.32 ccw(c339.82,750.89) J1.2@320.52,737.94 ; J1.3@358.78,868.28 cw(c339.47,855.33) 355.91,838.9 ccw(c329.07,865.73) J1.3@365.19,877.39 ; v1(740,1710) 525,1710 450,1785 ; C15.2@761.85,1490 761.85,1396.85 v1(750,1385) ; 794.46,674.46 ccw(c752.86,716.06) R7.1@811.69,716.06 ; C11.1@810.47,805 R7.1@810.47,720 810.47,690.47 ccw(c796.78,704.16) R7.1@811.39,716.86 ; R9.1@910.47,2000 905.47,1995 C14.1@905.47,1925 880,1925 850,1895 ; C7.2@1080,1510 1083.15,1513.15 C7.2@1083.15,1540 1138.15,1595 1237.04,1595 1273.52,1631.48 ; C9.1@1280,1104.53 1314.53,1104.53 v1(1345,1135) ; C12.1@1300,1660.47 1320,1640.47 v1(1320,1600) ; C23.1@2212.56,1530 2250,1530 v1(2260,1520) ; C16.2@2375,572.56 2375,600 v1(2390,615) ; C36.1@2404.49,1660.51 2435,1630 v1(2445,1630) ; C22.1@2462.5,1707.5 v1(2495,1675) ; C38.1@2494.49,1750.51 v1(2530,1715) ; P1.49@77.13,259.48 ccw(c49.76,286.85) 88.46,286.85 ; P1.49@77.13,259.48 ccw(c49.76,286.85) 88.46,286.85 ; P1.49@77.13,259.48 ccw(c49.76,286.85) 88.46,286.85 ; P1.50@77.13,338.94 cw(c49.76,311.57) 88.46,311.57 ; P1.50@77.13,338.94 cw(c49.76,311.57) 88.46,311.57 ; P1.50@77.13,338.94 cw(c49.76,311.57) 88.46,311.57 ; P1.50@77.13,359.48 ccw(c49.76,386.85) 88.46,386.85 ; P1.50@77.13,359.48 ccw(c49.76,386.85) 88.46,386.85 ; P1.50@77.13,359.48 ccw(c49.76,386.85) 88.46,386.85 ; 88.46,281.72 ccw(c119.91,281.72) P1.49@97.67,259.48 ; 88.46,281.72 ccw(c119.91,281.72) P1.49@97.67,259.48 ; 88.46,281.72 ccw(c119.91,281.72) P1.49@97.67,259.48 ; 88.46,316.71 cw(c119.91,316.71) P1.50@97.67,338.94 ; 88.46,316.71 cw(c119.91,316.71) P1.50@97.67,338.94 ; 88.46,316.71 cw(c119.91,316.71) P1.50@97.67,338.94 ; 88.46,381.72 ccw(c119.91,381.72) P1.50@97.67,359.48 ; 88.46,381.72 ccw(c119.91,381.72) P1.50@97.67,359.48 ; 88.46,381.72 ccw(c119.91,381.72) P1.50@97.67,359.48 ; 122.71,547.71 cw(c300.28,370.14) J1.2@300.28,621.26 ; 122.71,547.71 cw(c300.28,370.14) J1.2@300.28,621.26 ; 122.71,547.71 cw(c300.28,370.14) J1.2@300.28,621.26 ; 173.92,598.92 cw(c300.28,472.57) J1.2@300.28,651.26 ; 173.92,598.92 cw(c300.28,472.57) J1.2@300.28,651.26 ; 173.92,598.92 cw(c300.28,472.57) J1.2@300.28,651.26 ; 194.58,593.05 ccw(c158.68,727.57) J1.2@279.18,657.84 ; 194.58,593.05 ccw(c158.68,727.57) J1.2@279.18,657.84 ; 194.58,593.05 ccw(c158.68,727.57) J1.2@279.18,657.84 ; 216.35,600.69 ccw(c188.76,713.24) J1.2@287.85,653.16 ; 216.35,600.69 ccw(c188.76,713.24) J1.2@287.85,653.16 ; 216.35,600.69 ccw(c188.76,713.24) J1.2@287.85,653.16 ; 216.35,600.69 ccw(c188.76,713.24) J1.2@287.85,653.16 ; 216.35,600.69 ccw(c188.76,713.24) J1.2@287.85,653.16 ; 225.14,650.14 cw(c300.28,575) J1.2@300.28,681.26 ; 225.14,650.14 cw(c300.28,575) J1.2@300.28,681.26 ; 225.14,650.14 cw(c300.28,575) J1.2@300.28,681.26 ; 228.21,606.96 cw(c288.31,546.74) J1.2@298.53,631.21 ; 228.21,606.96 cw(c288.31,546.74) J1.2@298.53,631.21 ; 228.21,606.96 cw(c288.31,546.74) J1.2@298.53,631.21 ; 228.21,606.96 cw(c288.31,546.74) J1.2@298.53,631.21 ; 229.36,632.26 cw(c249.39,557.49) J1.2@288.09,624.52 ; 229.36,632.26 cw(c249.39,557.49) J1.2@288.09,624.52 ; 229.36,632.26 cw(c249.39,557.49) J1.2@288.09,624.52 ; 241.1,665.4 ccw(c225.88,722.21) J1.2@278.48,695.9 ; 241.1,665.4 ccw(c225.88,722.21) J1.2@278.48,695.9 ; 241.1,665.4 ccw(c225.88,722.21) J1.2@278.48,695.9 ; 252.31,638.41 cw(c266.19,586.6) J1.2@293.01,633.05 ; 252.31,638.41 cw(c266.19,586.6) J1.2@293.01,633.05 ; 252.31,638.41 cw(c266.19,586.6) J1.2@293.01,633.05 ; 252.31,638.41 cw(c266.19,586.6) J1.2@293.01,633.05 ; 252.31,638.41 cw(c266.19,586.6) J1.2@293.01,633.05 ; 252.81,668.54 cw(c264.84,623.62) J1.2@288.09,663.89 ; 252.81,668.54 cw(c264.84,623.62) J1.2@288.09,663.89 ; 252.81,668.54 cw(c264.84,623.62) J1.2@288.09,663.89 ; 254.72,639.05 ccw(c244.3,677.95) J1.2@279.17,657.82 ; 254.72,639.05 ccw(c244.3,677.95) J1.2@279.17,657.82 ; 254.72,639.05 ccw(c244.3,677.95) J1.2@279.17,657.82 ; 260.63,685.63 cw(c260.63,666.07) J1.2@278.29,674.5 ; 260.63,685.63 ccw(c260.63,706.23) J1.2@278.79,696.51 ; 260.63,685.63 cw(c260.63,666.07) J1.2@278.29,674.5 ; 260.63,685.63 ccw(c260.63,706.23) J1.2@278.79,696.51 ; 260.63,685.63 ccw(c260.63,706.23) J1.2@278.79,696.51 ; 260.63,685.63 cw(c260.63,666.07) J1.2@278.29,674.5 ; 264.56,611.73 ccw(c247.33,676.27) J1.2@305.15,642.81 ; 264.56,611.73 ccw(c247.33,676.27) J1.2@305.15,642.81 ; 264.56,611.73 ccw(c247.33,676.27) J1.2@305.15,642.81 ; P5.1@265.27,1994.73 cw(c302.14,1957.86) 302.14,2010 ; P5.1@265.27,1994.73 cw(c302.14,1957.86) 302.14,2010 ; P5.1@265.27,1994.73 cw(c302.14,1957.86) 302.14,2010 ; J1.2@273.15,690.49 ccw(c239.11,722.42) J1.2@285.76,723.91 ; J1.2@273.15,690.49 ccw(c239.11,722.42) J1.2@285.76,723.91 ; J1.2@273.15,690.49 ccw(c239.11,722.42) J1.2@285.76,723.91 ; J1.2@273.15,690.49 ccw(c239.11,722.42) J1.2@285.76,723.91 ; J1.2@273.15,690.49 ccw(c239.11,722.42) J1.2@285.76,723.91 ; J1.2@274.79,691.75 ccw(c241.95,720.88) J1.2@285.77,723.5 ; J1.2@274.79,691.75 ccw(c241.95,720.88) J1.2@285.77,723.5 ; J1.2@274.79,691.75 ccw(c241.95,720.88) J1.2@285.77,723.5 ; J1.2@274.79,691.75 ccw(c241.95,720.88) J1.2@285.77,723.5 ; J1.2@275.83,677.37 cw(c243.87,650.04) J1.2@285.79,646.76 ; J1.2@275.83,677.37 cw(c243.87,650.04) J1.2@285.79,646.76 ; J1.2@275.83,677.37 cw(c243.87,650.04) J1.2@285.79,646.76 ; J1.2@275.83,677.37 cw(c243.87,650.04) J1.2@285.79,646.76 ; J1.2@275.83,677.37 cw(c243.87,650.04) J1.2@285.79,646.76 ; J1.2@282.24,669.87 ccw(c303.6,688.12) J1.2@301.41,660.11 ; J1.2@282.24,669.87 ccw(c303.6,688.12) J1.2@301.41,660.11 ; J1.2@282.24,669.87 ccw(c303.6,688.12) J1.2@301.41,660.11 ; J1.2@282.24,669.87 ccw(c303.6,688.12) J1.2@301.41,660.11 ; J1.2@282.24,669.87 ccw(c303.6,688.12) J1.2@301.41,660.11 ; J1.2@284.8,724.37 cw(c356.09,724.37) 305.68,774.78 ; J1.2@284.8,724.37 cw(c356.09,724.37) 305.68,774.78 ; J1.2@284.8,724.37 cw(c356.09,724.37) 305.68,774.78 ; J1.2@286.69,617.93 ccw(c276.34,660.14) J1.2@313.51,637.61 ; J1.2@286.69,617.93 ccw(c276.34,660.14) J1.2@313.51,637.61 ; J1.2@286.69,617.93 ccw(c276.34,660.14) J1.2@313.51,637.61 ; J1.2@286.69,617.93 ccw(c276.34,660.14) J1.2@313.51,637.61 ; J1.2@286.69,617.93 ccw(c276.34,660.14) J1.2@313.51,637.61 ; J1.2@288.09,745.48 ccw(c234.72,837.92) 337.83,810.29 ; J1.2@288.09,745.48 ccw(c234.72,837.92) 337.83,810.29 ; J1.2@288.09,745.48 ccw(c234.72,837.92) 337.83,810.29 ; J1.2@288.09,745.48 ccw(c234.72,837.92) 337.83,810.29 ; J1.2@293.01,736.95 ccw(c235.29,836.93) 346.8,807.05 ; J1.2@293.01,736.95 ccw(c251.52,808.82) 331.68,787.34 ; J1.2@293.01,736.95 ccw(c235.29,836.93) 346.8,807.05 ; J1.2@293.01,736.95 ccw(c251.52,808.82) 331.68,787.34 ; J1.2@293.01,736.95 ccw(c235.29,836.93) 346.8,807.05 ; J1.2@293.01,736.95 ccw(c235.29,836.93) 346.8,807.05 ; J1.2@293.01,736.95 ccw(c251.52,808.82) 331.68,787.34 ; J1.2@293.01,736.95 ccw(c235.29,836.93) 346.8,807.05 ; J1.2@294.65,724.37 cw(c389.69,724.37) 322.48,791.58 ; J1.2@294.65,724.37 cw(c389.69,724.37) 322.48,791.58 ; J1.2@294.65,724.37 cw(c389.69,724.37) 322.48,791.58 ; J1.2@303.09,719.49 ccw(c269.7,777.33) 334.2,760.04 ; J1.2@303.09,719.49 ccw(c269.7,777.33) 334.2,760.04 ; J1.2@303.09,719.49 ccw(c269.7,777.33) 334.2,760.04 ; J1.2@304.94,762.79 ccw(c336.08,754.45) J1.2@311.4,733.72 ; J1.2@304.94,762.79 ccw(c336.08,754.45) J1.2@311.4,733.72 ; J1.2@304.94,762.79 ccw(c336.08,754.45) J1.2@311.4,733.72 ; J1.2@304.94,762.79 ccw(c336.08,754.45) J1.2@311.4,733.72 ; J1.2@304.94,762.79 ccw(c336.08,754.45) J1.2@311.4,733.72 ; 307.86,2010 cw(c307.86,1957.86) P5.2@344.73,1994.73 ; 307.86,2010 cw(c307.86,1957.86) P5.2@344.73,1994.73 ; 307.86,2010 cw(c307.86,1957.86) P5.2@344.73,1994.73 ; J1.2@308.01,710.97 ccw(c286.5,748.22) J1.2@328.05,737.09 ; J1.2@308.01,710.97 ccw(c286.5,748.22) J1.2@328.05,737.09 ; J1.2@308.01,710.97 ccw(c286.5,748.22) J1.2@328.05,737.09 ; J1.2@308.01,710.97 ccw(c286.5,748.22) J1.2@328.05,737.09 ; J1.2@308.01,710.97 ccw(c286.5,748.22) J1.2@328.05,737.09 ; 313.56,782.65 ccw(c214.36,881.85) J1.3@354.65,881.85 ; 313.56,782.65 ccw(c214.36,881.85) J1.3@354.65,881.85 ; 313.56,782.65 ccw(c214.36,881.85) J1.3@354.65,881.85 ; J1.2@314.06,728.97 cw(c365.54,746.16) 327.16,784.54 ; J1.2@314.06,728.97 cw(c365.54,746.16) 327.16,784.54 ; J1.2@314.06,728.97 cw(c365.54,746.16) 327.16,784.54 ; J1.2@314.06,728.97 cw(c365.54,746.16) 327.16,784.54 ; J1.2@314.06,728.97 cw(c365.54,746.16) 327.16,784.54 ; J1.2@314.06,728.97 cw(c365.54,746.16) 327.16,784.54 ; J1.2@314.8,724.37 cw(c458.52,724.37) 356.9,825.99 ; J1.2@314.8,724.37 cw(c458.52,724.37) 356.9,825.99 ; J1.2@314.8,724.37 cw(c458.52,724.37) 356.9,825.99 ; J1.2@321.21,736.84 cw(c354.83,756.87) 327.16,784.54 ; J1.2@321.21,736.84 cw(c354.83,756.87) 327.16,784.54 ; J1.2@321.21,736.84 cw(c354.83,756.87) 327.16,784.54 ; J1.2@324.65,724.37 cw(c492.12,724.37) 373.7,842.79 ; J1.2@324.65,724.37 cw(c492.12,724.37) 373.7,842.79 ; J1.2@324.65,724.37 cw(c492.12,724.37) 373.7,842.79 ; 330.36,799.45 ccw(c247.96,881.85) J1.3@364.49,881.85 ; 330.36,799.45 ccw(c247.96,881.85) J1.3@364.49,881.85 ; 330.36,799.45 ccw(c247.96,881.85) J1.3@364.49,881.85 ; 332.49,799.17 cw(c444,769.29) J1.3@386.28,869.27 ; 332.49,799.17 cw(c444,769.29) J1.3@386.28,869.27 ; 332.49,799.17 cw(c444,769.29) J1.3@386.28,869.27 ; 332.49,799.17 cw(c444,769.29) J1.3@386.28,869.27 ; 332.49,799.17 cw(c444,769.29) J1.3@386.28,869.27 ; 335.26,779.2 ccw(c385.03,729.44) 314.78,725.24 cw(c385.03,729.44) 335.26,779.2 ; 335.27,779.2 ccw(c368.75,745.72) 323.54,731.62 cw(c368.75,745.72) 335.27,779.2 ; 344.03,827.02 ccw(c294.26,876.78) 364.51,880.98 cw(c294.26,876.78) 344.03,827.02 ; 344.03,827.02 ccw(c310.54,860.5) 355.75,874.6 cw(c310.54,860.5) 344.03,827.02 ; 344.51,792.23 ccw(c249.43,847.13) J1.3@355.48,875.54 ; 344.51,792.23 ccw(c249.43,847.13) J1.3@355.48,875.54 ; 344.51,792.23 ccw(c249.43,847.13) J1.3@355.48,875.54 ; 344.51,792.23 ccw(c249.43,847.13) J1.3@355.48,875.54 ; 344.51,792.23 ccw(c249.43,847.13) J1.3@355.48,875.54 ; P5.20@344.73,1094.73 cw(c319.93,1069.93) 355,1069.93 ; P5.20@344.73,1094.73 cw(c319.93,1069.93) 355,1069.93 ; P5.20@344.73,1094.73 cw(c319.93,1069.93) 355,1069.93 ; 345.09,846.18 cw(c409.59,828.89) J1.3@376.2,886.73 ; 345.09,846.18 cw(c409.59,828.89) J1.3@376.2,886.73 ; 345.09,846.18 cw(c409.59,828.89) J1.3@376.2,886.73 ; 347.62,818.88 cw(c427.77,797.4) J1.3@386.28,869.27 ; 347.62,818.88 cw(c427.77,797.4) J1.3@386.28,869.27 ; 347.62,818.88 cw(c427.77,797.4) J1.3@386.28,869.27 ; J1.3@351.24,869.13 cw(c392.79,858) J1.3@371.28,895.25 ; J1.3@351.24,869.13 cw(c392.79,858) J1.3@371.28,895.25 ; J1.3@351.24,869.13 cw(c392.79,858) J1.3@371.28,895.25 ; J1.3@351.24,869.13 cw(c392.79,858) J1.3@371.28,895.25 ; J1.3@351.24,869.13 cw(c392.79,858) J1.3@371.28,895.25 ; 355,940.86 cw(c320.36,906.22) J1.3@365.6,887.42 ; 355,940.87 cw(c330.06,915.92) J1.3@359.01,895.77 ; 355,940.86 cw(c320.36,906.22) J1.3@365.6,887.42 ; 355,940.87 cw(c330.06,915.92) J1.3@359.01,895.77 ; 355,940.86 cw(c320.36,906.22) J1.3@365.6,887.42 ; 355,940.87 cw(c330.06,915.92) J1.3@359.01,895.77 ; 355,940.87 374.02,921.85 ; 355,940.87 355,1085 450,1180 450,1785 ; 355,1069.93 cw(c390.07,1069.93) P5.20@365.27,1094.73 ; 355,1069.93 cw(c390.07,1069.93) P5.20@365.27,1094.73 ; 355,1069.93 cw(c390.07,1069.93) P5.20@365.27,1094.73 ; P5.20@355,1119.53 ccw(c355,1202.88) 413.94,1143.94 ; P5.20@355,1119.53 ccw(c355,1202.88) 413.94,1143.94 ; P5.20@355,1119.53 ccw(c355,1202.88) 413.94,1143.94 ; 355.48,814.47 cw(c419.61,814.47) J1.3@386.51,869.41 ; 355.48,814.47 cw(c419.61,814.47) J1.3@386.51,869.41 ; 355.48,814.47 cw(c419.61,814.47) J1.3@386.51,869.41 ; 355.48,814.47 cw(c419.61,814.47) J1.3@386.51,869.41 ; 355.48,814.47 cw(c419.61,814.47) J1.3@386.51,869.41 ; 355.48,814.47 cw(c402.44,814.47) 387.02,858.83 ccw(c402.44,814.47) 355.48,814.47 ; 355.48,814.47 cw(c419.61,814.47) J1.3@386.51,869.41 ; 355.48,814.47 cw(c419.61,814.47) J1.3@386.51,869.41 ; J1.3@363.91,900.97 ccw(c347.41,921.85) 374.02,921.85 ; J1.3@363.91,900.97 ccw(c347.41,921.85) 374.02,921.85 ; J1.3@363.91,900.97 ccw(c347.41,921.85) 374.02,921.85 ; 364.77,833.86 ccw(c316.78,881.85) J1.3@384.65,881.85 ; 364.77,833.86 ccw(c316.78,881.85) J1.3@384.65,881.85 ; 364.77,833.86 ccw(c316.78,881.85) J1.3@384.65,881.85 ; P5.2@365.27,1994.73 cw(c402.14,1957.86) 402.14,2010 ; P5.2@365.27,1994.73 cw(c402.14,1957.86) 402.14,2010 ; P5.2@365.27,1994.73 cw(c402.14,1957.86) 402.14,2010 ; 374.02,842.79 cw(c408.32,842.79) J1.3@387.73,870.23 ; 374.02,842.79 cw(c408.32,842.79) J1.3@387.73,870.23 ; 374.02,842.79 cw(c408.32,842.79) J1.3@387.73,870.23 ; 374.02,921.85 ccw(c410.22,921.85) J1.3@387.95,893.3 ; 374.02,921.85 ccw(c391.57,921.85) J1.3@386.31,905.1 ; 374.02,921.85 ccw(c410.22,921.85) J1.3@387.95,893.3 ; 374.02,921.85 ccw(c391.57,921.85) J1.3@386.31,905.1 ; 374.02,921.85 ccw(c410.22,921.85) J1.3@387.95,893.3 ; 374.02,921.85 ccw(c391.57,921.85) J1.3@386.31,905.1 ; J1.3@381.57,850.67 ccw(c350.39,881.85) J1.3@394.49,881.85 ; J1.3@381.57,850.67 ccw(c350.39,881.85) J1.3@394.49,881.85 ; J1.3@381.57,850.67 ccw(c350.39,881.85) J1.3@394.49,881.85 ; 450,1785 450,2000 ; 450,2000 510,2000 615,1895 750,1895 850,1895 ; v1(750,1385) ccw(c721.39,1413.61) C6.2@761.85,1413.61 ; v1(750,1385) ccw(c721.39,1413.61) C6.2@761.85,1413.61 ; v1(750,1385) ccw(c721.39,1413.61) C6.2@761.85,1413.61 ; 850,1895 cw(c894.29,1850.71) C14.1@904.4,1912.53 ; 850,1895 cw(c894.29,1850.71) C14.1@904.4,1912.53 ; 850,1895 cw(c894.29,1850.71) C14.1@904.4,1912.53 ; 874.69,1909.55 ccw(c870.91,1947.37) C14.1@900.32,1923.31 ; 874.69,1909.55 ccw(c870.91,1947.37) C14.1@900.32,1923.31 ; 874.69,1909.55 ccw(c870.91,1947.37) C14.1@900.32,1923.31 ; C14.1@891.38,1936.38 cw(c905.92,1921.84) C14.1@909.24,1942.14 ; C14.1@891.38,1936.38 cw(c905.92,1921.84) C14.1@909.24,1942.14 ; C14.1@891.38,1936.38 cw(c905.92,1921.84) C14.1@909.24,1942.14 ; C7.2@1083.15,1558.46 ccw(c1083.15,1603.04) 1114.67,1571.52 ; C7.2@1083.15,1558.46 ccw(c1083.15,1603.04) 1114.67,1571.52 ; C7.2@1083.15,1558.46 ccw(c1083.15,1603.04) 1114.67,1571.52 ; C7.2@1088.91,1548.48 cw(c1121.83,1529.48) 1111.99,1566.19 ; C7.2@1088.91,1548.48 cw(c1121.83,1529.48) 1111.99,1566.19 ; C7.2@1088.91,1548.48 cw(c1121.83,1529.48) 1111.99,1566.19 ; 1169.37,1595 cw(c1169.37,1504.34) C4.2@1233.48,1568.44 ; 1169.37,1595 cw(c1169.37,1504.34) C4.2@1233.48,1568.44 ; 1169.37,1595 cw(c1169.37,1504.34) C4.2@1233.48,1568.44 ; 1207.63,1583.37 ccw(c1226.63,1616.29) C4.2@1236.47,1579.58 ; 1207.63,1583.37 ccw(c1226.63,1616.29) C4.2@1236.47,1579.58 ; 1207.63,1583.37 ccw(c1226.63,1616.29) C4.2@1236.47,1579.58 ; 1241.8,1595 cw(c1241.8,1576.76) C4.2@1254.7,1589.66 ; 1241.8,1595 cw(c1241.8,1576.76) C4.2@1254.7,1589.66 ; 1241.8,1595 cw(c1241.8,1576.76) C4.2@1254.7,1589.66 ; C4.2@1242.08,1560.67 cw(c1272.23,1579.74) 1247,1604.97 ; C4.2@1242.08,1560.67 cw(c1272.23,1579.74) 1247,1604.97 ; C4.2@1242.08,1560.67 cw(c1272.23,1579.74) 1247,1604.97 ; C4.2@1267.43,1576.71 cw(c1304.71,1600.29) 1273.52,1631.48 ; C4.2@1267.43,1576.71 cw(c1304.71,1600.29) 1273.52,1631.48 ; C4.2@1267.43,1576.71 cw(c1304.71,1600.29) 1273.52,1631.48 ; 1276.79,1634.75 ccw(c1251.06,1660.47) C12.1@1287.44,1660.47 ; 1276.79,1634.75 ccw(c1251.06,1660.47) C12.1@1287.44,1660.47 ; 1276.79,1634.75 ccw(c1251.06,1660.47) C12.1@1287.44,1660.47 ; 1276.79,1634.75 ccw(c1251.06,1660.47) C12.1@1287.44,1660.47 ; 1276.79,1634.75 ccw(c1251.06,1660.47) C12.1@1287.44,1660.47 ; 1276.79,1634.75 ccw(c1251.06,1660.47) C12.1@1287.44,1660.47 ; C9.1@1286.02,1111.18 ccw(c1287.47,1192.53) v1(1345,1135) ; C9.1@1286.02,1111.18 ccw(c1287.47,1192.53) v1(1345,1135) ; C9.1@1286.02,1111.18 ccw(c1287.47,1192.53) v1(1345,1135) ; C9.1@1291.61,1101.1 cw(c1324.18,1081.52) 1315,1118.39 ; C9.1@1291.61,1101.1 cw(c1324.18,1081.52) 1315,1118.39 ; C9.1@1291.61,1101.1 cw(c1324.18,1081.52) 1315,1118.39 ; C12.1@1301.2,1655.77 cw(c1255.82,1610.38) v1@1320,1610.38 ; C12.1@1301.2,1655.77 cw(c1255.82,1610.38) v1@1320,1610.38 ; C12.1@1301.2,1655.77 cw(c1255.82,1610.38) v1@1320,1610.38 ; C12.1@1312.32,1658.7 ccw(c1348.15,1648.8) 1315.96,1630.21 ; C12.1@1312.32,1658.7 ccw(c1348.15,1648.8) 1315.96,1630.21 ; C12.1@1312.32,1658.7 ccw(c1348.15,1648.8) 1315.96,1630.21 ; 2235.86,1530 cw(c2235.86,1495.86) v1(2260,1520) ; 2235.86,1530 cw(c2235.86,1495.86) v1(2260,1520) ; 2235.86,1530 cw(c2235.86,1495.86) v1(2260,1520) ; C16.2@2375,578.79 cw(c2426.21,578.79) v1(2390,615) ; C16.2@2375,578.79 cw(c2426.21,578.79) v1(2390,615) ; C16.2@2375,578.79 cw(c2426.21,578.79) v1(2390,615) ; C16.2@2377.7,572.72 cw(c2422.33,582.66) v1(2390,615) ; C16.2@2377.7,572.72 cw(c2422.33,582.66) v1(2390,615) ; C16.2@2377.7,572.72 cw(c2422.33,582.66) v1(2390,615) ; 2427.93,1637.07 ccw(c2445,1654.14) v1(2445,1630) ; 2427.93,1637.07 ccw(c2445,1654.14) v1(2445,1630) ; 2427.93,1637.07 ccw(c2445,1654.14) v1(2445,1630) ; C25.1@2598.84,1879.12 ccw(c2642.21,1879.12) v1@2611.55,1848.45 ; C25.1@2598.84,1879.12 ccw(c2642.21,1879.12) v1@2611.55,1848.45 ; C25.1@2598.84,1879.12 ccw(c2642.21,1879.12) v1@2611.55,1848.45 ; C25.1@2599.49,1880.51 ccw(c2647.89,1880.51) v1(2615,1845) ; C25.1@2599.49,1880.51 ccw(c2647.89,1880.51) v1(2615,1845) ; C25.1@2599.49,1880.51 ccw(c2647.89,1880.51) v1(2615,1845) ; C25.1@2599.49,1880.51 2599.49,1860.51 v1(2615,1845) ; 244.97,612.08 cw(c277.31,578.33) 292.41,622.57 ccw(c277.31,578.33) 244.97,612.08 ; 244.98,612.08 cw(c293.09,561.86) 299.03,631.16 ccw(c293.09,561.86) 244.98,612.08 ; J1.2@279.27,623.45 ccw(c282.15,666.37) 310.46,633.98 cw(c282.15,666.37) J1.2@279.27,623.45 ; J1.2@311.65,713.88 ccw(c280.03,743.04) 323.01,744.78 cw(c280.03,743.04) J1.2@311.65,713.88 ; J1.3@356.28,861.44 cw(c399.26,863.18) 367.64,892.34 ccw(c399.26,863.18) J1.3@356.28,861.44 ; 359.17,839.93 ccw(c344.86,861.01) 366.61,874.28 cw(c344.86,861.01) 359.17,839.93 ; J1.3@363.84,845.87 ccw(c347.29,861.83) 366.73,874.1 cw(c347.29,861.83) J1.3@363.84,845.87
LED_1: D2.1 U2.36 | length 368.4
  Top Layer w10: U2.36@2650.11,2067.29 2725,2142.18 D2.1@2725,2282.44 ; D2.1@2717.4,2274.84 cw(c2699.05,2256.49) 2725,2256.49 ; D2.1@2717.4,2274.84 cw(c2699.05,2256.49) 2725,2256.49 ; D2.1@2717.4,2274.84 cw(c2699.05,2256.49) 2725,2256.49 ; 2725,2256.49 cw(c2750.95,2256.49) D2.1@2732.6,2274.84 ; 2725,2256.49 cw(c2750.95,2256.49) D2.1@2732.6,2274.84 ; 2725,2256.49 cw(c2750.95,2256.49) D2.1@2732.6,2274.84
MCLK: P2.43 U2.56 | length 3093.6
  Top Layer w10: P2.43@387.4,2249.21 435,2296.81 435,2405 465,2435 780,2435 840,2375 840,2325 860,2305 905,2305 935,2275 935,2165 990,2110 1195,2110 1370,1935 2144.75,1935 2152.75,1927 2161.24,1927 U2.56@2285.42,1802.82 ; P2.43@382.04,2250.31 cw(c419.7,2242.6) 409.75,2279.73 ; P2.43@382.04,2250.31 cw(c419.7,2242.6) 409.75,2279.73 ; P2.43@382.04,2250.31 cw(c419.7,2242.6) 409.75,2279.73 ; P2.43@387.4,2263.74 ccw(c387.4,2298.81) 412.2,2274.01 ; P2.43@387.4,2263.74 ccw(c387.4,2298.81) 412.2,2274.01 ; P2.43@387.4,2263.74 ccw(c387.4,2298.81) 412.2,2274.01 ; P2.43@387.4,2273.74 ccw(c387.4,2332.95) 429.27,2291.08 ; P2.43@387.4,2273.74 ccw(c387.4,2332.95) 429.27,2291.08 ; P2.43@387.4,2273.74 ccw(c387.4,2332.95) 429.27,2291.08 ; P2.43@388.5,2243.85 ccw(c380.79,2281.51) 417.92,2271.56 ; P2.43@388.5,2243.85 ccw(c380.79,2281.51) 417.92,2271.56 ; P2.43@388.5,2243.85 ccw(c380.79,2281.51) 417.92,2271.56 ; P2.43@401.93,2249.21 cw(c437,2249.21) 412.2,2274.01 ; P2.43@401.93,2249.21 cw(c437,2249.21) 412.2,2274.01 ; P2.43@401.93,2249.21 cw(c437,2249.21) 412.2,2274.01 ; P2.43@411.93,2249.21 cw(c471.14,2249.21) 429.27,2291.08 ; P2.43@411.93,2249.21 cw(c471.14,2249.21) 429.27,2291.08 ; P2.43@411.93,2249.21 cw(c471.14,2249.21) 429.27,2291.08
MMISO: P1.38 U2.96 | length 2413.5
  Top Layer w10: P1.38@681.99,350.05 cw(c717.63,344.5) 708.29,379.34 ; P1.38@685.81,350.81 1061,726 1788.67,726 1789.67,727 1941.18,727 2304.18,1090 2313.11,1090 U2.96@2382.86,1159.74 ; P1.38@688.73,343.9 ccw(c678.76,383.61) 718.31,373.01 ; P1.38@687.4,363.74 ccw(c687.4,391.11) 706.76,371.76 cw(c687.4,391.11) P1.38@687.4,363.74 ; P1.38@687.4,373.74 ccw(c687.4,425.26) 723.83,388.83 cw(c687.4,425.26) P1.38@687.4,373.74 ; P1.38@701.93,349.21 cw(c744.7,349.21) 714.46,379.46 ccw(c744.7,349.21) P1.38@701.93,349.21 ; P1.38@711.93,349.21 cw(c778.84,349.21) 731.53,396.53 ccw(c778.84,349.21) P1.38@711.93,349.21
MMOSI: P1.40 U2.93 U5.8 U6.13 | length 4882.2
  Top Layer w10: P1.40@581.94,349.61 cw(c614.45,347.25) 606.01,378.73 ; P1.40@583.31,353.31 988,758 1775.42,758 1776.42,759 1898.6,759 U2.93@2341.1,1201.5 ; P1.40@586.02,353.53 ccw(c568.73,407.69) 623.65,392.98 ; P1.40@586.9,353.71 ccw(c584.19,378.2) 607.99,371.83 ; P1.40@589.07,344 ccw(c575.35,386.97) 618.92,375.29 ; v2@1983.75,844.05 ccw(c1992.8,835) v2@1980,835 ; 2254.2,1110.77 ccw(c2248.14,1133.38) v1(2270,1125) ; v2@1980,835 ccw(c1980,821.95) 1970.78,831.18 cw(c1980,821.95) v2@1980,835 ; v1(2270,1125) ccw(c2261.62,1146.86) 2284.23,1140.8 ; v1(2270,1125) ccw(c2261.62,1146.86) 2284.23,1140.8 ; v1(2270,1125) ccw(c2261.62,1146.86) 2284.23,1140.8 ; v1@2270,1135 ccw(c2270,1146.1) 2277.85,1138.25 ; v1@2270,1135 ccw(c2270,1146.1) 2277.85,1138.25 ; v1@2270,1135 ccw(c2270,1146.1) 2277.85,1138.25 ; v1@2280,1125 cw(c2317.19,1125) 2290.89,1151.3 ; v1@2280,1125 cw(c2317.19,1125) 2290.89,1151.3 ; v1@2280,1125 cw(c2317.19,1125) 2290.89,1151.3 ; P1.40@587.4,373.74 ccw(c587.4,413.18) 615.29,385.29 cw(c587.4,413.18) P1.40@587.4,373.74 ; P1.40@601.93,349.21 cw(c656.77,349.21) 617.99,387.99 ccw(c656.77,349.21) P1.40@601.93,349.21 ; P1.40@611.93,349.21 cw(c690.91,349.21) 635.06,405.06 ccw(c690.91,349.21) P1.40@611.93,349.21 ; 1971.75,832.15 ccw(c1963.9,840) 1975,840 cw(c1963.9,840) 1971.75,832.15 ; v2@1980,845 ccw(c1980,856.1) 1987.85,848.25 cw(c1980,856.1) v2@1980,845 ; v2@1985,840 cw(c1998.05,840) 1988.82,849.22 ccw(c1998.05,840) v2@1985,840 ; 2243.7,1104.11 cw(c2270,1077.81) 2270,1115 ccw(c2270,1077.81) 2243.7,1104.11 ; 2256.75,1117.15 ccw(c2248.9,1125) 2260,1125 cw(c2248.9,1125) 2256.75,1117.15
  Bottom Layer w10: U5.8@1881.93,865 1955,865 v2(1980,840) ; U6.13@3035,958.07 3035,915 ; U5.8@1917.26,860.18 cw(c1928.89,848.56) 1928.89,865 ; U5.8@1917.26,860.18 cw(c1928.89,848.56) 1928.89,865 ; U5.8@1917.26,860.18 cw(c1928.89,848.56) 1928.89,865 ; U5.8@1917.26,869.82 ccw(c1928.89,881.44) 1928.89,865 ; U5.8@1917.26,869.82 ccw(c1928.89,881.44) 1928.89,865 ; U5.8@1917.26,869.82 ccw(c1928.89,881.44) 1928.89,865 ; 1971.46,848.54 cw(c1962.93,840) 1975,840 ccw(c1962.93,840) 1971.46,848.54 ; 1971.46,848.54 ccw(c1980,857.07) 1980,845 cw(c1980,857.07) 1971.46,848.54 ; v1@2270,1115 cw(c2270,1042.57) 2321.21,1093.79 ; v1@2270,1115 cw(c2270,1042.57) 2321.21,1093.79 ; v1@2270,1115 cw(c2270,1042.57) 2321.21,1093.79 ; v1@2270,1115 2280,1125 2290,1125 ; v1(2270,1125) cw(c2270,1076.72) 2304.14,1110.86 ; v1(2270,1125) ccw(c2298.56,1141.49) 2290.02,1109.63 ; v1(2270,1125) ccw(c2298.56,1141.49) 2290.02,1109.63 ; v1(2270,1125) cw(c2270,1076.72) 2304.14,1110.86 ; v1(2270,1125) ccw(c2298.56,1141.49) 2290.02,1109.63 ; v1(2270,1125) cw(c2270,1076.72) 2304.14,1110.86 ; v1@2270,1135 cw(c2270,1110.86) 2287.07,1127.93 ; v1@2270,1135 cw(c2270,1110.86) 2287.07,1127.93 ; v1@2270,1135 cw(c2270,1110.86) 2287.07,1127.93 ; v1@2275,1116.34 cw(c2287.07,1095.43) 2293.32,1118.75 ; v1@2275,1116.34 cw(c2287.07,1095.43) 2293.32,1118.75 ; v1@2275,1116.34 cw(c2287.07,1095.43) 2293.32,1118.75 ; v1@2278,1119 cw(c2290,1110) 2290,1125 ; v1@2278,1119 cw(c2290,1110) 2290,1125 ; v1@2278,1119 cw(c2290,1110) 2290,1125 ; v1@2278,1131 ccw(c2290,1140) 2290,1125 ; v1@2278,1131 ccw(c2290,1140) 2290,1125 ; v1@2278,1131 ccw(c2290,1140) 2290,1125 ; v1@2278.66,1130 ccw(c2299.57,1142.07) 2293.32,1118.75 ; v1@2278.66,1130 ccw(c2299.57,1142.07) 2293.32,1118.75 ; v1@2278.66,1130 ccw(c2299.57,1142.07) 2293.32,1118.75 ; 2290,1125 2495,920 2540,920 2565,895 3015,895 ; 3015,895 ccw(c2983.15,926.85) U6.13@3028.19,927.47 ; 3015,895 ccw(c2983.15,926.85) U6.13@3028.19,927.47 ; 3015,895 ccw(c2983.15,926.85) U6.13@3028.19,927.47 ; 3015,895 3035,915 ; U6.13@3031.29,921.85 cw(c3026.83,915) 3035,915 ; U6.13@3031.29,921.85 cw(c3026.83,915) 3035,915 ; U6.13@3031.29,921.85 cw(c3026.83,915) 3035,915 ; 3031.75,911.75 ccw(c3016.2,927.3) U6.13@3038.19,927.6 ; 3031.75,911.75 ccw(c3016.2,927.3) U6.13@3038.19,927.6 ; 3031.75,911.75 ccw(c3016.2,927.3) U6.13@3038.19,927.6 ; 3035,915 cw(c3043.17,915) U6.13@3038.71,921.85 ; 3035,915 cw(c3043.17,915) U6.13@3038.71,921.85 ; 3035,915 cw(c3043.17,915) U6.13@3038.71,921.85